# Altium PCB PCB7.PcbDoc (part 2 of 2)
Units mm, origin at the board's own origin, x right, y up, seen from the top; angles counter-clockwise.
Board outline 94.6 x 54.68 mm, 2 copper layers (Top Layer, Bottom Layer); 56 components, 165 nets, 539 pads, 324 vias.
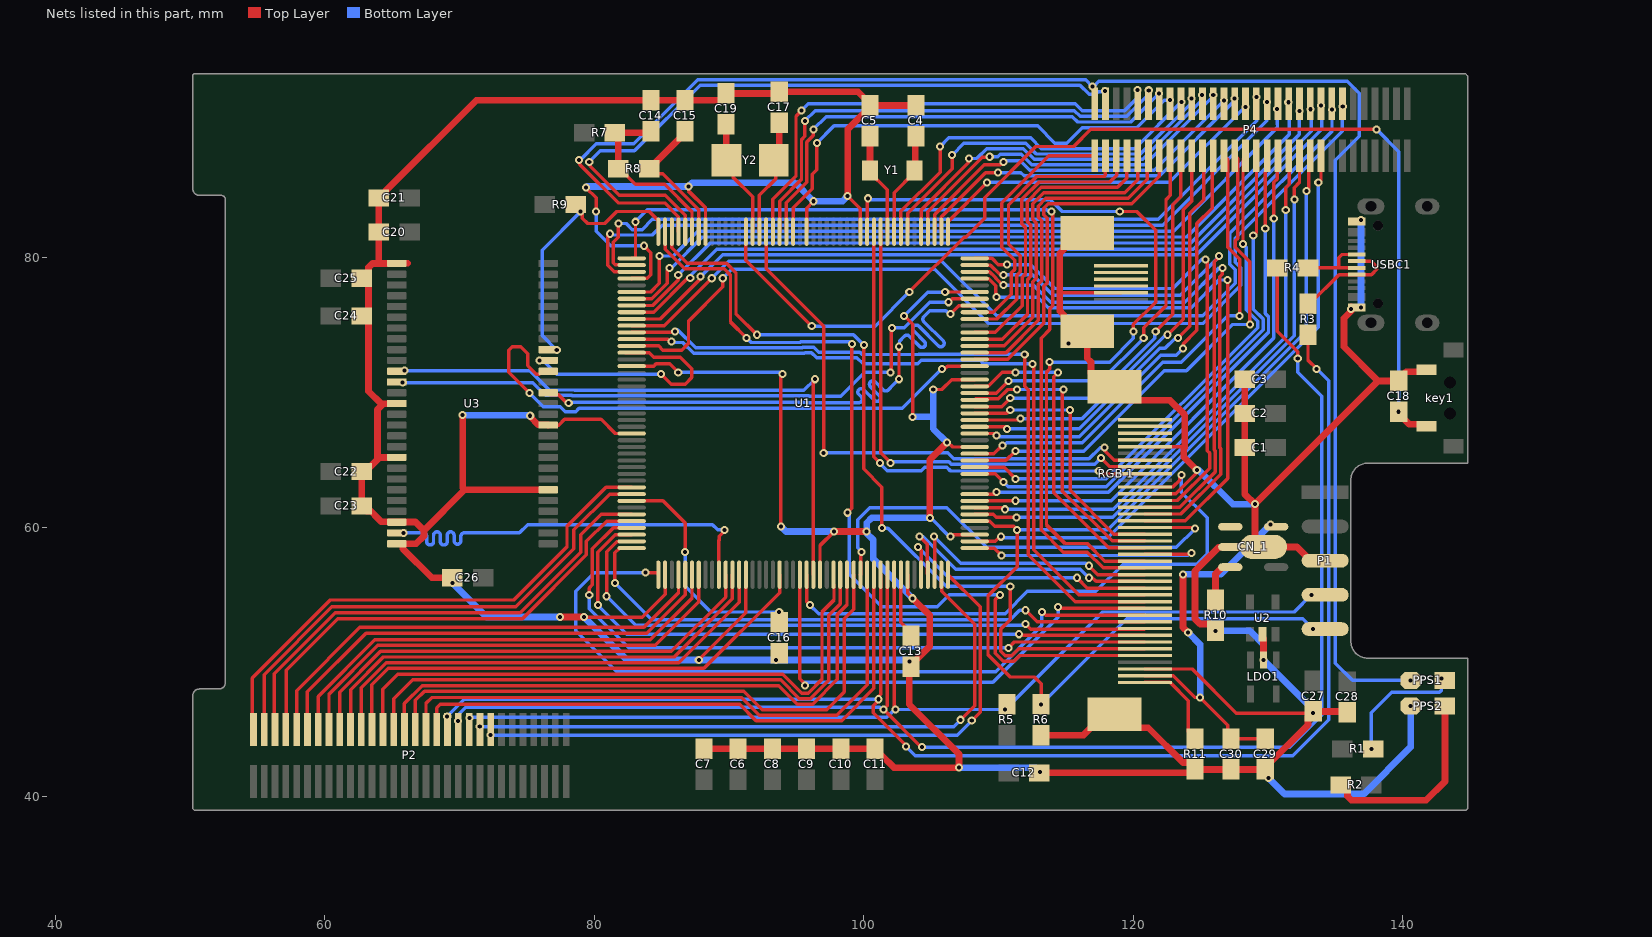
[diagram p2: the nets of this part, all layers, seen from the top]

## Via types
v1: diameter 0.6, hole 0.3, Top Layer to Bottom Layer, 324 vias

## Nets (pads, with @x,y where several pads share a name; then routed paths per layer and width w, separated by ;. In a path a pad name is that pad's centre, name@x,y a point inside that pad or via, vN(x,y) a via of type N, cw(c..) or ccw(c..) an arc to the next point about the centre after c; other vN are vias at no path point) (continued)
FMC_D15: U1.98 U3.53 | length 32
  Top Layer w0.254: U1.98@89.254,56.488 89.254,59.028 89.281,59.055 89.281,59.342 89.662,59.723 v1(89.662,59.817)
  Bottom Layer w0.254: v1(65.843,59.595) 66.675,59.595 67.31,59.595 cw(c67.31,59.341) 67.564,59.341 67.564,58.943 ccw(c67.818,58.943) 68.072,58.943 68.072,59.414 cw(c68.326,59.414) 68.58,59.414 68.58,58.943 ccw(c68.834,58.943) 69.088,58.943 69.088,59.414 cw(c69.342,59.414) 69.596,59.414 69.596,59.004 ccw(c69.85,59.004) 70.104,59.004 70.104,59.341 cw(c70.358,59.341) 70.358,59.595 70.997,59.595 74.454,59.595 75.057,60.198 88.773,60.198 89.154,59.817 v1(89.662,59.817)
FMC_NBL0: U1.169 U3.15 | length 48.3
  Top Layer w0.254: U3.15@76.581,69.989 76.724,69.846 77.347,69.846 77.978,69.215 v1(78.105,69.215) ; v1(102.616,70.993) v1(102.616,73.406) ; v1(106.426,75.819) 107.063,76.456 108.222,76.456 U1.169@108.231,76.465
  Bottom Layer w0.254: v1(78.105,69.215) 78.232,69.215 78.301,69.284 95.826,69.284 95.86,69.25 99.348,69.25 99.633,69.25 ccw(c99.633,69.504) 99.813,69.684 99.633,69.863 cw(c99.813,70.043) 99.633,70.222 cw(c99.813,70.043) 99.992,70.222 100.797,69.418 ccw(c100.977,69.597) 101.156,69.418 ccw(c100.977,69.597) 101.156,69.777 100.497,70.436 cw(c100.676,70.616) 100.497,70.795 cw(c100.676,70.616) 100.856,70.795 101.458,70.194 ccw(c101.637,70.373) 101.817,70.194 102.235,70.612 v1(102.616,70.993) ; v1(102.616,73.406) 102.653,73.443 102.653,73.662 102.653,73.824 103.021,74.192 cw(c103.201,74.012) 103.38,74.192 104.148,73.424 ccw(c104.328,73.603) 104.508,73.424 ccw(c104.328,73.603) 104.508,73.783 103.708,74.583 cw(c103.887,74.763) 103.708,74.942 cw(c103.887,74.763) 104.067,74.942 105.535,73.474 ccw(c105.715,73.653) 105.895,73.474 ccw(c105.715,73.653) 105.895,73.833 104.458,75.27 cw(c104.637,75.449) 104.458,75.629 104.902,76.073 105.156,76.073 106.104,76.073 106.358,75.819 v1(106.426,75.819)
FMC_NBL1: U1.170 U3.39 | length 47.7
  Top Layer w0.254: v1(101.981,71.501) 102.039,71.559 102.039,74.734 v1(102.108,74.803) ; v1(106.299,76.708) 106.556,76.965 U1.170@108.231,76.965
  Bottom Layer w0.254: v1(65.786,70.739) 75.438,70.739 76.385,69.792 78.344,69.792 78.378,69.758 95.923,69.758 95.958,69.723 98.298,69.723 100.076,71.501 v1(101.981,71.501) ; v1(102.108,74.803) 102.997,74.803 104.902,76.708 v1(106.299,76.708)
FMC_SDCLK: U1.112 U3.38 | length 46
  Top Layer w0.254: U1.112@96.254,56.488 96.254,70.854 v1(96.393,70.993)
  Bottom Layer w0.254: v1(65.913,71.628) 75.23,71.628 76.662,70.196 78.511,70.196 78.545,70.162 95.562,70.162 v1(96.393,70.993)
FMC_SDNCAS: U1.160 U3.17 | length 43.3
  Top Layer w0.254: v1(75.184,69.977) 73.66,71.501 73.66,73.152 73.914,73.406 74.549,73.406 75.057,72.898 75.057,72.009 75.692,71.374 75.916,71.374 76.131,71.589 U3.17@76.581,71.589 ; v1(105.791,71.755) 106.006,71.755 106.216,71.965 U1.160@108.231,71.965
  Bottom Layer w0.254: v1(75.184,69.977) 76.2,68.961 77.47,68.961 77.851,68.58 78.613,68.58 78.867,68.834 102.87,68.834 v1(105.791,71.755)
FMC_SDNE0: R9.2 U1.44 U3.19 | length 20.4
  Top Layer w0.254: R9.2@78.613,83.947 79.121,83.439 79.121,82.931 79.502,82.55 80.772,82.55 81.661,83.439 84.089,83.439 84.754,82.774 U1.44@84.754,81.942
  Bottom Layer w0.254: v1(77.216,73.152) 76.131,74.237 76.131,80.576 v1(78.994,83.439)
FMC_SDNRAS: U1.59 U3.18 | length 18.3
  Top Layer w0.254: U1.59@82.296,72.956 83.689,72.956 83.698,72.965 84.069,72.965 84.412,72.622 86.382,72.622 87.249,71.755 87.249,71.12 86.741,70.612 85.725,70.612 v1(84.963,71.374)
  Bottom Layer w0.254: v1(75.946,72.39) 76.012,72.324 76.266,72.324 77.216,71.374 v1(84.963,71.374)
GND: "RGB 1.3" "RGB 1.29" "RGB 1.36" "RGB 1.45" "RGB 1.G1" "RGB 1.G2" "RGB 1.G3" "RGB 1.G4" C1.2 C2.1 C3.1 C4.1 C5.1 C6.2 C7.2 C8.2 C9.2 C10.2 C11.2 C12.2 C13.2 C14.1 C15.2 C16.2 C17.2 C18.1 C19.2 C20.1 C21.1 C22.1 C23.1 C24.1 C25.1 C26.1 C27.1 C28.1 C29.2 C30.2 CN_1.2 key1.1 LDO1.2 P1.3 PPS2.2 R6.1 R10.1 R11.2 U1.14 U1.22 U1.37 U1.48 U1.61 U1.71 U1.90 U1.102 U1.113 U1.126 U1.135 U1.148 U1.158 U1.171 U2.2 U3.6 U3.12 U3.28 U3.41 U3.46 U3.52 U3.54 USBC1.A1 USBC1.A12 USBC1.B1 USBC1.B12 | length 521.1
  Top Layer w0.254: U3.12@76.581,67.589 77.368,67.589 77.793,68.014 80.503,68.014 81.552,66.965 U1.71@82.777,66.965 ; v1(79.248,53.34) 83.566,53.34 85.254,55.028 U1.90@85.254,56.488 ; v1(79.375,85.217) 80.137,84.455 v1(80.137,83.439) ; U1.61@82.777,71.965 84.411,71.965 84.582,72.136 85.598,72.136 v1(86.233,71.501) ; U1.48@82.777,78.465 82.786,78.474 83.935,78.474 84.201,78.74 84.201,80.391 v1(83.693,80.899) ; v1@86.995,85.217 86.995,84.963 88.254,83.704 U1.37@88.254,81.942 ; v1(87.757,50.165) 91.254,53.662 U1.102@91.254,56.488 ; v1(93.853,60.071) 93.853,71.153 93.98,71.28 v1(93.98,71.374) ; U1.22@95.754,81.942 95.754,83.689 v1(96.266,84.201) ; U1.113@96.754,56.488 96.754,58.654 v1(97.79,59.69) ; v1(98.806,84.582) 99.754,83.634 U1.14@99.754,81.942 ; v1(102.997,75.692) 103.632,75.057 v1(103.632,68.199) ; U1.126@103.254,56.488 103.254,55.115 v1(103.632,54.737) ; v1(105.156,70.231) 105.794,70.231 106.528,70.965 U1.158@108.231,70.965 ; v1(106.045,77.47) 106.05,77.465 U1.171@108.231,77.465 ; v1(106.172,66.294) 106.266,66.294 106.595,65.965 U1.148@108.231,65.965 ; v1(106.426,59.309) 106.582,59.465 U1.135@108.231,59.465 ; 114.554,77.47 114.613,77.411 119.087,77.411 ; 120.857,49.491 124.372,49.491 127.658,46.205 C27.1@133.108,46.205 ; 120.857,62.491 123.161,62.491 124.714,64.044 v1(124.714,64.262) ; 120.857,65.991 123.747,65.991 123.825,65.913
  Top Layer w0.5: 64.161,69.189 63.246,70.104 63.246,75.692 63.246,78.486 63.246,79.296 63.539,79.589 64.008,79.589 ; U3.54@65.341,58.789 U3.54@65.791,58.789 ; U3.46@65.341,65.189 63.919,65.189 ; U3.41@65.341,69.189 65.321,69.169 64.343,69.169 63.919,68.745 63.919,65.189 ; 66.147,79.609 65.361,79.609 U3.28@65.341,79.589 64.008,79.589 ; C26.1@69.469,56.261 67.957,56.261 65.811,58.407 65.811,58.769 U3.54@65.791,58.789 ; v1(70.231,68.326) 70.231,62.934 70.376,62.789 ; v1(75.248,68.284) 75.248,68.206 75.845,67.609 76.561,67.609 U3.12@76.581,67.589 ; U3.6@76.581,62.789 70.376,62.789 ; v1(77.47,53.34) v1(79.248,53.34) ; C7.2@88.138,43.561 C6.2@90.678,43.561 C8.2@93.218,43.561 C9.2@95.758,43.561 C10.2@98.298,43.561 C11.2@100.838,43.561 100.838,43.434 101.223,43.049 101.35,43.049 102.235,42.164 v1(107.061,42.164) 107.061,43.18 103.378,46.863 103.378,49.53 C13.2@103.505,49.657 103.505,49.784 104.902,51.181 104.902,53.467 v1(103.632,54.737) ; v1(97.79,59.69) v1(100.203,59.69) ; v1(98.806,84.582) 98.806,89.535 100.457,91.186 C5.1@100.457,91.313 ; C4.1@103.886,91.313 C5.1@100.457,91.313 ; v1(104.902,60.706) 104.902,65.024 v1(106.172,66.294) ; C12.2@113.03,41.783 124.333,41.783 R11.2@124.587,42.037 ; R6.1@113.157,44.577 116.308,44.577 117.86,46.129 118.61,46.129 119.61,45.129 121.114,45.129 123.694,42.549 124.202,42.549 124.587,42.164 R11.2@124.587,42.037 ; 116.586,81.849 115.836,81.849 114.836,80.849 114.836,80.623 114.554,80.341 114.554,77.47 114.554,76.057 114.836,75.775 114.836,75.549 115.836,74.549 116.586,74.549 116.586,72.549 116.86,72.275 116.86,71.429 117.86,70.429 118.61,70.429 119.61,69.429 122.722,69.429 123.825,68.326 123.825,65.913 ; 123.747,65.991 123.747,65.229 v1(124.714,64.262) ; v1(126.111,52.324) 126.111,52.451 125.726,52.836 124.964,52.836 124.587,53.213 124.587,56.769 126.35,58.532 127.49,58.532 CN_1.2@127.505,58.547 ; C3.1@128.27,70.993 C2.1@128.27,68.453 C1.2@128.27,65.913 128.27,62.484 v1(129.032,61.722) ; U2.2@129.606,52.07 129.606,51.82 129.667,51.759 v1(129.667,50.165) ; P1.3@134.239,57.531 133.14,57.531 132.9,57.771 132.9,57.802 132.155,58.547 CN_1.2@129.655,58.547 129.633,58.547 129.032,59.148 v1(129.032,61.722) ; C28.1@135.881,46.268 135.809,46.34 C27.1@133.358,46.34 132.973,45.955 132.973,45.343 129.794,42.164 C29.2@129.794,42.037 C30.2@127.254,42.037 R11.2@124.587,42.037 ; USBC1.A1@136.169,76.052 136.069,75.952 135.636,75.519 135.636,73.406 138.176,70.866 ; USBC1.A1@136.169,76.152 v1(136.169,76.202) USBC1.B12@136.169,76.352 ; key1.1@141.76,71.696 141.61,71.546 140.253,71.546 139.7,70.993 C18.1@139.7,70.866 138.176,70.866 ; 63.919,65.189 63.919,65.043 63.396,64.52 63.123,64.52 C22.1@62.738,64.135 C23.1@62.738,61.595 63.123,61.21 63.411,61.21 63.919,60.702 64.212,60.409 65.321,60.409 U3.52@65.341,60.389 66.738,60.389 67.357,59.77 ; 64.008,79.589 C20.1@64.008,81.915 C21.1@64.008,84.455 64.135,84.455 64.52,84.84 64.52,84.967 71.247,91.694 C14.1@84.201,91.694 C15.2@86.741,91.694 89.404,91.694 89.789,92.079 C19.2@89.789,92.202 93.599,92.202 C17.2@93.726,92.329 99.568,92.329 100.457,91.44 C5.1@100.457,91.313 ; U3.54@65.791,58.789 66.79,58.789 67.357,59.356 67.357,59.77 ; 67.357,59.77 70.376,62.789 ; v1(129.032,61.722) 138.176,70.866
  Bottom Layer w0.254: v1(80.137,83.439) 80.137,81.988 81.226,80.899 v1(83.693,80.899) ; v1(86.233,71.501) 93.759,71.501 93.886,71.374 v1(93.98,71.374) ; v1@102.902,75.597 v1(102.997,75.692) 104.738,77.433 106.008,77.433 v1(106.045,77.47) ; v1(104.902,60.706) 104.966,60.706 106.363,59.309 v1(106.426,59.309)
  Bottom Layer w0.5: v1(69.469,55.88) 72.009,53.34 v1(77.47,53.34) ; v1(70.231,68.326) 75.206,68.326 v1(75.248,68.284) ; v1(79.248,53.34) 82.423,50.165 v1(87.757,50.165) v1(93.472,50.165) 103.251,50.165 v1(103.378,50.038) ; v1(79.375,85.217) 79.402,85.217 79.478,85.293 v1(86.996,85.293) 87.282,85.579 94.888,85.579 v1(96.266,84.201) 98.425,84.201 v1(98.806,84.582) ; v1(93.853,60.071) 94.234,59.69 v1(97.79,59.69) ; v1(103.632,54.737) 100.711,57.658 100.711,59.055 100.203,59.563 v1(100.203,59.69) 100.222,59.709 100.222,60.344 100.584,60.706 v1(104.902,60.706) ; v1(103.632,68.199) 105.156,68.199 ; v1(105.156,70.231) 105.156,68.199 ; v1(106.172,66.294) 105.156,67.31 105.156,68.199 ; v1(107.061,42.164) 112.749,42.164 113.066,41.846 v1(113.093,41.846) ; v1(124.714,64.262) 124.841,64.262 127.381,61.722 v1(129.032,61.722) ; v1(126.111,52.324) 128.651,52.324 129.667,51.308 v1(129.667,50.165) 133.35,46.482 v1(133.35,46.228) ; v1(130.048,41.402) 131.238,40.212 137.113,40.212 140.589,43.688 v1(140.589,46.736) ; v1(136.906,76.327) v1(136.906,82.804)
  other v1: 115.189,73.66
LCD_B0: "RGB 1.21" U1.157 | length 24.1
  Top Layer w0.254: U1.157@108.231,70.465 109.235,70.465 110.271,71.501 v1(111.252,71.501) ; v1(114.427,71.501) 114.104,71.178 114.104,62.553 118.166,58.491 120.857,58.491
  Bottom Layer w0.254: v1(111.252,71.501) v1(114.427,71.501)
LCD_B1: "RGB 1.22" U1.155 | length 22.1
  Top Layer w0.254: U1.155@108.231,69.465 108.304,69.538 109.987,69.538 110.68,70.231 v1(111.379,70.231) ; v1(114.808,70.231) 114.739,70.162 114.739,62.68 118.428,58.991 120.857,58.991
  Bottom Layer w0.254: v1(111.379,70.231) v1(114.808,70.231)
LCD_B2: "RGB 1.23" U1.153 | length 20
  Top Layer w0.254: U1.153@108.231,68.465 110.629,68.465 v1(110.871,68.707) ; v1(115.316,68.707) 115.316,62.738 118.563,59.491 120.857,59.491
  Bottom Layer w0.254: v1(110.871,68.707) v1(115.316,68.707)
LCD_B3: "RGB 1.24" U1.119 | length 35.2
  Top Layer w0.254: U1.119@99.754,56.488 99.763,56.497 99.763,58.107 v1(99.822,58.166) ; 120.857,59.991 124.413,59.991 v1@124.587,59.817
  Bottom Layer w0.254: v1(99.822,58.166) 99.822,58.234 99.568,58.488 99.568,60.579 100.457,61.468 106.172,61.468 109.13,58.51 123.186,58.51 v1(124.587,59.911)
LCD_B4: "RGB 1.25" U1.173 | length 43.1
  Top Layer w0.254: U1.173@108.231,78.465 109.261,78.465 109.382,78.344 109.382,78.334 109.786,77.93 109.786,77.158 v1(109.855,77.089) ; 120.857,60.491 123.864,60.491 127,63.627 v1(127,78.359)
  Bottom Layer w0.254: v1(109.855,77.089) 112.913,77.089 113.698,76.304 124.31,76.304 126.365,78.359 v1(127,78.359)
LCD_B5: "RGB 1.26" U1.174 | length 42.6
  Top Layer w0.254: U1.174@108.231,78.965 109.332,78.965 109.786,78.511 109.786,78.501 110.309,77.978 v1(110.363,77.978) ; 120.857,60.991 123.529,60.991 126.48,63.942 126.48,65.852 126.423,65.909 126.423,78.598 126.619,78.794 v1(126.619,79.248)
  Bottom Layer w0.254: v1(110.363,77.978) 112.595,77.978 113.865,76.708 123.825,76.708 126.365,79.248 v1(126.619,79.248)
LCD_B6: "RGB 1.27" U1.175 | length 42.8
  Top Layer w0.254: U1.175@108.231,79.465 109.403,79.465 110.128,78.74 v1(110.363,78.74) ; 120.857,61.491 123.457,61.491 126.076,64.11 126.076,65.684 126.019,65.741 126.019,79.718 126.365,80.064 v1(126.365,80.137)
  Bottom Layer w0.254: v1(110.363,78.74) 112.522,78.74 114.046,77.216 123.498,77.216 126.365,80.083 v1(126.365,80.137)
LCD_B7: "RGB 1.28" U1.176 | length 40.4
  Top Layer w0.254: U1.176@108.231,79.965 109.519,79.965 109.982,79.502 v1(110.617,79.502) ; 120.857,61.991 123.268,61.991 125.672,64.395 125.672,65.517 125.499,65.69 125.499,79.733 v1(125.349,79.883)
  Bottom Layer w0.254: v1(110.617,79.502) 112.395,79.502 114.173,77.724 122.936,77.724 125.095,79.883 v1(125.349,79.883)
LCD_CLK: "RGB 1.30" U1.111 | length 43.8
  Top Layer w0.254: U1.111@95.754,56.488 95.754,54.487 v1(96.012,54.229) ; 120.857,62.991 120.859,62.993 122.937,62.993 123.444,63.5 123.444,63.754 v1(123.571,63.881)
  Bottom Layer w0.254: v1(96.012,54.229) 96.647,53.594 110.49,53.594 112.141,55.245 117.221,55.245 119.253,57.277 124.714,57.277 125.476,58.039 125.476,60.706 123.571,62.611 v1(123.571,63.881)
LCD_CS: "RGB 1.38"
LCD_DE: "RGB 1.34" U1.28 | length 43
  Top Layer w0.254: U1.28@92.754,81.942 92.754,79.204 97.028,74.93 97.028,71.301 97.031,71.298 97.031,70.927 97.031,70.8 97.031,65.535 v1(97.028,65.532) ; v1(117.856,65.913) 117.856,65.713 118.578,64.991 120.857,64.991
  Bottom Layer w0.254: v1(97.028,65.532) 106.226,65.532 106.676,65.082 116.717,65.082 117.548,65.913 v1(117.856,65.913)
LCD_G0: "RGB 1.13" U1.56 | length 55.1
  Top Layer w0.254: U1.56@82.777,74.465 85.895,74.465 v1(85.979,74.549) ; v1(111.945,72.84) 111.945,70.481 112.21,70.216 112.21,57.97 115.689,54.491 120.857,54.491
  Bottom Layer w0.254: v1@85.979,74.676 86.179,74.676 87.541,73.314 95.422,73.314 95.479,73.371 96.291,73.371 96.665,72.998 99.722,72.998 99.891,72.829 104.071,72.829 104.082,72.84 v1(111.945,72.84)
LCD_G1: "RGB 1.14" U1.57 | length 54.3
  Top Layer w0.254: U1.57@82.777,73.965 85.453,73.965 85.631,73.787 v1(85.725,73.787) ; v1(112.522,72.136) 112.614,72.044 112.614,58.328 115.951,54.991 120.857,54.991
  Bottom Layer w0.254: v1(85.725,73.787) 85.791,73.721 86.563,73.721 87.374,72.91 95.589,72.91 95.646,72.967 96.124,72.967 96.497,72.594 99.491,72.594 99.949,72.136 104.013,72.136 104.267,72.39 108.649,72.39 108.839,72.2 108.839,72.136 v1(112.522,72.136)
LCD_G2: "RGB 1.15" U1.128 | length 20.3
  Top Layer w0.254: v1(104.013,58.547) 104.254,58.306 U1.128@104.254,56.488 ; v1(115.824,56.261) 116.594,55.491 120.857,55.491
  Bottom Layer w0.254: v1(104.013,58.547) 106.299,56.261 v1(115.824,56.261)
LCD_G3: "RGB 1.16" U1.129 | length 21.2
  Top Layer w0.254: v1(104.14,59.309) 104.706,58.743 104.706,56.536 U1.129@104.754,56.488 ; v1(116.713,56.261) 116.967,56.261 117.237,55.991 120.857,55.991
  Bottom Layer w0.254: v1(104.14,59.309) 104.409,59.309 106.822,56.896 116.078,56.896 v1(116.713,56.261)
LCD_G4: "RGB 1.17" U1.130 | length 19.6
  Top Layer w0.254: v1(105.226,59.308) 105.254,59.28 U1.130@105.254,56.488 ; v1(116.713,57.15) 117.372,56.491 120.857,56.491
  Bottom Layer w0.254: v1(105.226,59.308) 107.199,57.335 116.46,57.335 116.645,57.15 v1(116.713,57.15)
LCD_G5: "RGB 1.18" U1.45 | length 67.2
  Top Layer w0.254: U1.45@82.777,79.965 83.037,79.965 83.058,79.986 v1(83.058,82.677) ; v1(113.919,83.439) 114.022,83.336 114.022,76.43 113.797,76.205 113.797,74.681 113.158,74.042 113.158,59.816 114.808,58.166 116.586,58.166 117.761,56.991 120.857,56.991
  Bottom Layer w0.254: v1(83.058,82.677) 83.947,83.566 113.597,83.566 113.658,83.505 113.853,83.505 v1(113.919,83.439)
LCD_G6: "RGB 1.19" U1.13 | length 61
  Top Layer w0.254: U1.13@100.254,81.942 100.254,84.252 100.33,84.328 v1(100.33,84.422) ; v1(113.792,72.263) 113.792,71.755 113.562,71.525 113.562,60.174 114.935,58.801 116.586,58.801 117.896,57.491 120.857,57.491 ; v1(118.999,83.439) 120.269,83.439 121.666,82.042 121.666,76.708 120.015,75.057 v1(120.015,74.549)
  Bottom Layer w0.254: v1@100.33,84.328 113.846,84.328 114.735,83.439 v1(118.999,83.439) ; v1(113.792,72.263) 118.246,72.263 120.015,74.032 v1(120.015,74.549)
LCD_G7: "RGB 1.20" U1.133 | length 20.1
  Top Layer w0.254: U1.133@108.231,58.465 109.683,58.465 v1(110.236,57.912) ; 120.857,57.991 124.285,57.991 v1@124.333,58.039
  Bottom Layer w0.254: v1@110.065,57.912 124.019,57.912 124.215,58.109 v1(124.309,58.109)
LCD_HSVNC: "RGB 1.32" U1.12 | length 37.6
  Top Layer w0.254: U1.12@100.754,81.942 100.754,65.235 v1(101.219,64.77) ; v1(117.441,64.169) 117.619,63.991 120.857,63.991
  Bottom Layer w0.254: v1(101.219,64.77) 101.219,64.716 101.742,64.193 104.262,64.193 104.527,64.458 106.157,64.458 106.435,64.18 117.43,64.18 v1(117.441,64.169)
LCD_R0: "RGB 1.5" U1.43 | length 66
  Top Layer w0.254: U1.43@85.254,81.942 85.254,80.65 86.46,79.444 86.714,79.19 89.647,79.19 90.112,78.725 90.112,75.242 v1(91.313,74.041) ; v1(98.806,61.087) 98.806,61.091 99.123,61.409 v1(99.123,73.596) ; v1(110.109,54.991) 109.763,54.645 109.763,50.648 110.338,50.073 111.15,50.073 111.568,50.491 120.857,50.491
  Bottom Layer w0.254: v1(91.313,74.041) 91.636,73.718 95.254,73.718 95.311,73.775 98.945,73.775 v1(99.123,73.596) ; v1(98.806,61.087) 98.933,60.96 98.933,56.515 101.346,54.102 105.464,54.102 106.353,54.991 v1(110.109,54.991)
LCD_R1: "RGB 1.6" U1.42 | length 61.8
  Top Layer w0.254: U1.42@85.754,81.942 85.754,80.743 86.903,79.594 89.814,79.594 90.516,78.892 90.516,75.854 v1(92.075,74.295) ; v1(100.003,73.533) 100.003,64.335 101.346,62.992 v1(101.346,59.944) ; v1(110.871,55.626) 110.871,53.159 110.167,52.455 110.167,50.815 110.505,50.477 110.983,50.477 111.497,50.991 120.857,50.991
  Bottom Layer w0.254: v1(92.075,74.295) 99.241,74.295 v1(100.003,73.533) ; v1(101.346,59.944) 101.8,59.944 106.118,55.626 v1(110.871,55.626)
LCD_R2: "RGB 1.7" U1.85 | length 50.7
  Top Layer w0.254: v1(79.629,54.991) 79.629,55.499 79.86,55.73 79.86,58.397 81.428,59.965 U1.85@82.777,59.965 ; v1(110.744,51.054) 111.181,51.491 120.857,51.491
  Bottom Layer w0.254: v1(79.629,54.991) 79.629,53.975 82.55,51.054 v1(110.744,51.054)
LCD_R3: "RGB 1.8" U1.86 | length 48.5
  Top Layer w0.254: v1(80.264,54.229) 80.264,58.166 81.554,59.456 82.768,59.456 U1.86@82.777,59.465 ; v1(111.506,52.07) 111.585,51.991 120.857,51.991
  Bottom Layer w0.254: v1(80.264,54.229) 82.423,52.07 v1(111.506,52.07)
LCD_R4: "RGB 1.9" U1.87 | length 45.5
  Top Layer w0.254: v1(80.922,54.887) 80.922,58.189 81.661,58.928 U1.87@81.788,58.928 ; v1(112.014,52.832) 112.408,52.438 120.803,52.438 120.857,52.491
  Bottom Layer w0.254: v1(80.922,54.887) 83.069,52.74 111.922,52.74 v1(112.014,52.832)
LCD_R5: "RGB 1.10" U1.88 | length 44.7
  Top Layer w0.254: v1(81.534,55.88) 81.534,58.11 81.889,58.465 U1.88@82.777,58.465 ; v1(112.014,53.848) 112.871,52.991 120.857,52.991
  Bottom Layer w0.254: v1(81.534,55.88) 84.27,53.144 110.856,53.144 111.56,53.848 v1(112.014,53.848)
LCD_R6: "RGB 1.11" U1.89 | length 55.8
  Top Layer w0.254: v1(83.812,56.642) 84.733,56.642 84.754,56.621 U1.89@84.754,56.488 ; v1(113.221,53.721) 113.284,53.721 113.514,53.491 120.857,53.491
  Bottom Layer w0.254: v1(83.812,56.642) 80.01,56.642 78.613,55.245 78.613,52.324 81.661,49.276 109.782,49.276 113.221,52.715 v1(113.221,53.721)
LCD_R7: "RGB 1.12" U1.110 | length 36.6
  Top Layer w0.254: U1.110@95.254,56.488 95.254,48.764 95.631,48.387 v1(95.631,48.26) ; v1(114.427,54.102) 114.538,53.991 120.857,53.991
  Bottom Layer w0.254: v1@95.489,48.514 109.591,48.514 114.427,53.35 v1(114.427,54.102)
LCD_RESTE: "RGB 1.37"
LCD_SCL: "RGB 1.39"
LCD_SDI: "RGB 1.40"
LCD_VSYNC: "RGB 1.33" U1.11 | length 36.9
  Top Layer w0.254: U1.11@101.254,81.942 101.254,65.551 101.981,64.824 v1(101.981,64.77) ; v1(117.602,65.151) 118.262,64.491 120.857,64.491
  Bottom Layer w0.254: v1(101.981,64.77) 102.073,64.862 106.324,64.862 106.508,64.678 117.129,64.678 v1(117.602,65.151)
LEDA: "RGB 1.2" C29.1 C30.1 CN_1.5 | length 29
  Top Layer w0.254: 120.857,48.991 122.967,48.991 124.587,47.371 v1(124.968,47.371) 127.022,45.317 127.022,44.555 C30.1@127.254,44.323 C29.1@129.794,44.323
  Top Layer w0.5: v1(123.698,56.515) 123.698,53.183 123.698,52.578 v1(124.079,52.197)
  Bottom Layer w0.5: v1(123.698,56.515) 126.492,56.515 v1(130.175,60.198) ; v1(124.079,52.197) 124.968,51.308 v1(124.968,47.371)
LEDK: "RGB 1.1" R11.1 | length 6.8
  Top Layer w0.254: 120.857,48.491 122.728,48.491 124.079,47.14 124.079,44.831 R11.1@124.587,44.323
NetC13_1: C13.1 U1.125 | length 4.5
  Top Layer w0.254: U1.125@102.754,56.488 102.754,52.948 103.378,52.324 C13.1@103.505,52.324
NetC16_1: C16.1 U1.81 | length 17.1
  Top Layer w0.254: U1.81@82.777,61.965 85.101,61.965 86.741,60.325 v1(86.741,58.166)
  Bottom Layer w0.254: v1(86.741,58.166) 86.741,55.626 88.646,53.721 v1(93.726,53.721)
NetCN_1_3: CN_1.3 R10.2 | length 3.2
  Top Layer w0.5: R10.2@126.111,54.61 126.111,56.541 126.617,57.047 CN_1.3@127.205,57.047
NetPPS1_1: PPS1.1 R1.1 | length 9.4
  Bottom Layer w0.254: v1(137.668,43.561) 137.668,46.228 139.192,47.752 142.726,47.752 142.875,47.901 v1(142.875,48.768)
NetPPS2_1: PPS2.1 R2.1 | length 14.7
  Top Layer w0.5: R2.1@135.382,40.894 135.509,40.894 135.894,40.509 135.894,40.044 136.187,39.751 141.732,39.751 143.129,41.148 PPS2.1@143.129,46.736
NetR3_1: R3.1 USBC1.A7 USBC1.B7 | length 8
  Top Layer w0.254: R3.1@132.969,76.581 133.096,76.581 135.267,78.752 USBC1.B7@136.569,78.752 137.68,78.752 138.071,79.143 138.071,79.353 137.668,79.756 136.573,79.756 USBC1.A7@136.569,79.752
NetR4_1: R4.1 USBC1.A6 USBC1.B6 | length 5.8
  Top Layer w0.254: R4.1@132.969,79.248 132.973,79.252 135.255,79.252 ; USBC1.A6@136.569,79.252 135.255,79.252 ; USBC1.B6@136.569,80.252 135.497,80.252 135.255,80.01 135.255,79.252
OSC_IN: C17.1 U1.29 Y2.2 | length 8.9
  Top Layer w0.254: U1.29@92.254,81.942 92.254,84.634 93.472,85.852 Y2.2@93.472,87.404
  Top Layer w0.5: Y2.2@93.317,87.249 93.472,87.404 93.726,87.658 C17.1@93.726,90.043
OSC_OUT: C19.1 U1.30 Y2.1 | length 8.8
  Top Layer w0.254: Y2.1@90.297,87.122 90.297,85.979 91.754,84.522 U1.30@91.754,81.942
  Top Layer w0.5: C19.1@89.789,89.916 89.789,87.63 Y2.1@90.297,87.122
PA0: P4.57 U1.40 | length 51.2
  Top Layer w0.254: v1(79.629,87.122) 79.695,87.056 79.695,86.802 81.852,84.645 85.281,84.645 86.754,83.172 U1.40@86.754,81.942
  Bottom Layer w0.254: v1(79.629,87.122) 80.448,87.941 82.988,87.941 87.86,92.813 116.048,92.813 116.728,92.133 117.206,92.133 117.39,92.317 v1@117.962,92.317
  other v1: 117.903,92.383
PA1: P4.59 PPS1.2 U1.41 | length 120.6
  Top Layer w0.254: v1(78.867,87.249) 78.933,87.183 78.933,86.929 81.788,84.074 85.217,84.074 86.245,83.046 86.245,81.951 U1.41@86.254,81.942
  Bottom Layer w0.254: v1(78.867,87.249) 78.94,87.249 80.152,88.461 82.937,88.461 87.693,93.217 116.46,93.217 v1(116.967,92.71) 117.061,92.71 117.442,93.091 135.89,93.091 136.779,92.202 136.779,89.027 135.001,87.249 135.001,49.911 136.271,48.641 v1(140.589,48.641)
PA3: P4.27 U1.47 | length 58.1
  Top Layer w0.254: v1(81.153,81.788) 81.003,81.638 81.003,79.447 81.485,78.965 U1.47@82.777,78.965
  Bottom Layer w0.254: v1(81.153,81.788) 81.245,81.696 84.297,81.696 85.031,82.43 122.181,82.43 128.651,88.9 129.921,90.17 v1(129.921,91.567)
PA4: P4.25 U1.50 | length 55.6
  Top Layer w0.254: U1.50@82.777,77.465 84.196,77.465 84.836,78.105 v1(84.836,80.137)
  Bottom Layer w0.254: v1(84.836,80.137) 85.852,80.137 87.683,81.968 122.989,81.968 130.705,89.684 130.705,89.894 130.683,89.916 v1(130.683,91.059)
PA5: P4.23 U1.51 | length 56.8
  Top Layer w0.254: U1.51@82.777,76.965 84.267,76.965 85.402,78.1 85.402,79.052 v1(85.598,79.248)
  Bottom Layer w0.254: v1(85.598,79.248) 85.598,79.253 85.537,79.314 85.791,79.314 88.026,81.549 123.967,81.549 131.572,89.154 v1@131.572,91.44
  other v1: 131.505,91.549
PA6: P4.21 U1.52 | length 56.7
  Top Layer w0.254: U1.52@82.777,76.465 84.339,76.465 86.233,78.359 v1(86.233,78.74)
  Bottom Layer w0.254: v1(86.233,78.74) 88.595,81.102 124.282,81.102 132.334,89.154 v1@132.334,90.805
  other v1: 132.346,90.885
PA7: P4.19 U1.53 | length 57.6
  Top Layer w0.254: U1.53@82.777,75.965 84.41,75.965 86.958,78.513 v1(87.122,78.513)
  Bottom Layer w0.254: v1(87.122,78.513) 87.122,78.667 89.1,80.645 124.46,80.645 133.223,89.408 v1@133.223,90.932
  other v1: 133.148,91.028
PA9: P2.34 U1.120 | length 44.5
  Top Layer w0.254: P2.34@67.514,45.008 67.514,46.94 67.945,47.371 90.932,47.371 92.236,46.067 98.01,46.067 100.254,48.311 U1.120@100.254,56.488
PA10: P2.36 U1.121 | length 44.1
  Top Layer w0.254: P2.36@68.314,45.008 68.314,46.597 68.58,46.863 90.805,46.863 92.005,45.663 98.368,45.663 100.754,48.049 U1.121@100.754,56.488
PA11/USB_DM: P2.38 R3.2 U1.122 | length 108.5
  Top Layer w0.254: U1.122@101.254,56.488 101.254,47.601 101.158,47.505 101.158,47.31 v1(101.092,47.244) 101.092,47.15 100.711,46.769 100.711,46.228 103.124,43.815 v1(103.124,43.752) ; R3.2@132.969,74.295 132.969,72.39 v1(133.604,71.755)
  Bottom Layer w0.254: v1(69.088,45.974) 70.358,47.244 v1(101.092,47.244) ; v1(103.124,43.752) 103.822,43.053 131.826,43.053 134.493,45.72 134.493,70.866 v1(133.604,71.755)
PA12/USB_DP: P2.40 R4.2 U1.123 | length 111.7
  Top Layer w0.254: U1.123@101.754,56.488 101.754,46.763 v1(101.473,46.482) 104.267,43.688 v1(104.315,43.688) ; R4.2@130.683,79.248 130.683,74.549 132.207,73.025 v1(132.207,72.517)
  Bottom Layer w0.254: v1(69.886,45.641) 69.891,45.646 69.891,46.091 70.454,46.654 101.207,46.654 101.379,46.482 v1(101.473,46.482) ; v1(104.315,43.688) 131.626,43.688 133.985,46.047 133.985,69.723 132.207,71.501 v1(132.207,72.517)
"PA13 SWDIO": P1.4 P2.42 R5.2 U1.124 | length 76.3
  Top Layer w0.254: U1.124@102.254,56.488 102.254,46.59 v1(102.362,46.482)
  Bottom Layer w0.254: v1(70.739,45.847) 70.797,45.905 101.712,45.905 102.289,46.482 v1(102.362,46.482) v1(110.49,46.482) 117.729,53.721 131.953,53.721 v1(133.223,54.991)
"PA14 SWCLK": P1.5 P4.20 R6.2 U1.137 | length 83.8
  Top Layer w0.254: U1.137@108.231,60.465 108.24,60.456 109.343,60.456 109.728,60.071 111.125,60.071 v1(111.379,59.817) 111.379,57.077 109.22,54.918 109.22,50.546 110.871,48.895 112.649,48.895 113.157,48.387 v1(113.157,46.863) ; v1(132.842,84.963) 133.035,85.156 133.035,87.48 P4.20@133.135,87.58
  Bottom Layer w0.254: v1(111.379,59.817) 118.12,59.817 132.842,74.539 v1(132.842,84.963) ; v1(113.157,46.863) 119.507,53.213 132.588,53.213 v1(133.35,52.451)
PA15: P4.22 U1.138 | length 42.9
  Top Layer w0.254: U1.138@108.231,60.965 109.596,60.965 109.826,60.735 v1(111.35,60.735) ; v1(131.953,84.328) 131.953,85.217 132.335,85.599 P4.22@132.335,87.58
  Bottom Layer w0.254: v1(111.35,60.735) 118.466,60.735 131.953,74.222 v1(131.953,84.328)
PB2: P4.13 U1.58 | length 68.6
  Top Layer w0.254: U1.58@82.777,73.465 84.777,73.465 85.09,73.152 86.487,73.152 86.995,73.66 86.995,75.311 89.535,77.851 v1(89.535,78.486)
  Bottom Layer w0.254: v1(89.535,78.486) 90.193,79.144 105.26,79.144 109.278,75.126 125.154,75.126 127.981,77.953 127.981,79.273 127.566,79.688 127.566,81.465 135.509,89.408 v1@135.509,91.059
  other v1: 135.547,91.219
PB3: P4.48 U1.161 | length 26.1
  Top Layer w0.254: U1.161@108.231,72.465 110.692,72.465 113.364,75.137 113.364,77.878 113.618,78.132 113.618,82.924 113.342,83.2 113.342,83.678 113.68,84.016 119.903,84.016 121.935,86.048 P4.48@121.935,87.58
PB4: P4.50 U1.162 | length 25.1
  Top Layer w0.254: U1.162@108.231,72.965 110.557,72.965 112.96,75.368 112.96,78.045 113.214,78.299 113.214,82.757 112.938,83.033 112.938,83.845 113.513,84.42 119.625,84.42 121.031,85.826 121.031,87.476 P4.50@121.135,87.58
PB5: P4.52 U1.163 | length 24.2
  Top Layer w0.254: U1.163@108.231,73.465 110.422,73.465 112.556,75.599 112.556,78.213 112.81,78.467 112.81,82.589 112.534,82.865 112.534,84.013 113.345,84.824 119.368,84.824 120.335,85.791 P4.52@120.335,87.58
PB6: P4.54 U1.164 | length 23
  Top Layer w0.254: U1.164@108.231,73.965 110.287,73.965 112.152,75.83 112.152,78.38 112.406,78.634 112.406,82.422 112.13,82.698 112.13,84.18 113.178,85.228 118.833,85.228 119.507,85.902 119.507,87.552 P4.54@119.535,87.58
PB7: P4.56 U1.165 | length 21.7
  Top Layer w0.254: U1.165@108.231,74.465 109.771,74.465 111.748,76.442 111.748,78.547 112.002,78.801 112.002,82.255 111.726,82.531 111.726,84.347 113.011,85.632 118.271,85.632 118.767,86.128 118.767,87.548 P4.56@118.735,87.58
PB8: P4.58 U1.167 | length 20.7
  Top Layer w0.254: U1.167@108.231,75.465 109.882,75.465 111.344,76.927 111.344,78.715 111.598,78.969 111.598,80.172 110.744,81.026 110.744,83.937 112.843,86.036 117.843,86.036 117.935,86.128 P4.58@117.935,87.58
PB9: P4.60 U1.168 | length 18.9
  Top Layer w0.254: U1.168@108.231,75.965 109.62,75.965 110.94,77.285 110.94,78.882 111.194,79.136 111.194,79.814 110.236,80.772 110.236,84.074 113.742,87.58 P4.60@117.135,87.58
PB10: P2.2 U1.79 | length 38
  Top Layer w0.254: P2.2@54.61,45.72 54.61,48.822 60.398,54.61 74.041,54.61 77.978,58.547 77.978,60.071 80.872,62.965 U1.79@82.777,62.965
PB11: P2.4 U1.80 | length 37.8
  Top Layer w0.254: P2.4@55.514,45.008 55.514,45.847 55.514,46.116 55.499,46.101 55.495,46.097 55.495,49.071 60.526,54.102 74.168,54.102 78.486,58.42 78.486,59.817 81.134,62.465 U1.80@82.777,62.465
PB12: P2.10 U1.92 | length 35.6
  Top Layer w0.254: P2.10@57.914,45.008 57.914,47.881 62.611,52.578 83.693,52.578 86.254,55.139 U1.92@86.254,56.488
PB13: P2.12 U1.93 | length 35.3
  Top Layer w0.254: P2.12@58.714,45.008 58.714,47.792 63.061,52.139 83.889,52.139 86.754,55.004 U1.93@86.754,56.488
PB14: P2.14 U1.94 | length 34.9
  Top Layer w0.254: P2.14@59.514,45.008 59.514,47.449 63.717,51.652 84.164,51.652 87.254,54.742 U1.94@87.254,56.488
PB15: P2.16 U1.95 | length 34.9
  Top Layer w0.254: P2.16@60.314,45.008 60.314,47.614 63.944,51.244 84.518,51.244 87.754,54.48 U1.95@87.754,56.488
PC4: P4.17 U1.54 | length 58.8
  Top Layer w0.254: U1.54@82.777,75.465 84.89,75.465 87.884,78.459 v1(87.884,78.613)
  Bottom Layer w0.254: v1(87.884,78.613) 87.884,78.599 89.526,80.241 124.691,80.241 133.985,89.535 v1@133.985,91.186
  other v1: 133.92,91.31
PC5: P4.15 U1.55 | length 65.5
  Top Layer w0.254: U1.55@82.777,74.965 85.198,74.965 v1(88.719,78.486)
  Bottom Layer w0.254: v1(88.719,78.486) 89.989,79.756 105.791,79.756 109.855,75.692 125.149,75.692 127.577,78.12 127.577,79.106 127.162,79.521 127.162,81.823 134.747,89.408 v1@134.747,90.805
  other v1: 134.753,90.993
PC6: P2.26 U1.115 | length 44.4
  Top Layer w0.254: P2.26@64.314,45.008 64.314,47.994 65.405,49.086 93.989,49.086 95.392,47.683 95.87,47.683 96.901,48.714 96.901,53.721 97.79,54.61 U1.115@97.79,55.753
PC7: P2.28 U1.116 | length 44.5
  Top Layer w0.254: P2.28@65.114,45.008 65.114,47.27 66.523,48.68 93.824,48.68 95.225,47.279 96.037,47.279 97.409,48.651 97.409,53.467 98.254,54.312 U1.116@98.254,56.488
PC8: P2.30 U1.117 | length 44
  Top Layer w0.254: P2.30@65.914,45.008 65.914,46.927 67.236,48.249 93.683,48.249 95.057,46.875 96.205,46.875 98.044,48.714 98.044,53.531 98.754,54.241 U1.117@98.754,56.488
PC9: P2.32 U1.118 | length 44.4
  Top Layer w0.254: P2.32@66.714,45.008 66.714,47.156 67.403,47.845 91.093,47.845 92.467,46.471 97.242,46.471 98.552,47.781 98.552,53.213 99.254,53.915 U1.118@99.254,56.488
PC10: P4.24 U1.139 | length 41.7
  Top Layer w0.254: U1.139@108.231,61.465 108.24,61.456 110.375,61.456 v1(110.49,61.341) ; v1(131.318,83.566) 131.318,85.217 131.572,85.471 P4.24@131.572,86.741 ; P4.24@131.535,87.58 131.548,87.58 131.56,87.161 P4.24@131.632,87.232
  Bottom Layer w0.254: v1(110.49,61.341) 118.501,61.341 131.318,74.158 v1(131.318,83.566)
PC11: P4.26 U1.140 | length 40.9
  Top Layer w0.254: U1.140@108.231,61.965 111.241,61.965 v1(111.252,61.976) ; v1(130.429,82.931) 130.429,85.598 130.683,85.852 130.683,87.528 P4.26@130.735,87.58
  Bottom Layer w0.254: v1(111.252,61.976) 118.364,61.976 130.44,74.052 130.44,82.92 v1(130.429,82.931)
PC12: P4.28 U1.141 | length 40
  Top Layer w0.254: U1.141@108.231,62.465 109.709,62.465 v1(109.855,62.611) ; v1(129.794,82.169) 129.794,86.338 129.812,86.356 129.812,87.457 P4.28@129.935,87.58
  Bottom Layer w0.254: v1(109.855,62.611) 118.164,62.611 130.036,74.483 130.036,75.631 129.794,75.873 v1(129.794,82.169)
PC13: P4.43 U1.8 | length 27.5
  Top Layer w0.254: U1.8@102.754,81.942 102.754,83.45 105.664,86.36 v1(105.664,88.265)
  Bottom Layer w0.254: v1(105.664,88.265) 106.31,88.911 112.384,88.911 113.185,88.11 120.114,88.11 v1(123.571,91.567)
PC14: C4.2 U1.9 Y1.2 | length 7.8
  Top Layer w0.254: U1.9@102.254,81.942 102.254,84.832 103.759,86.337 Y1.2@103.759,86.487
  Top Layer w0.5: Y1.2@103.759,86.487 103.822,86.55 103.822,88.963 C4.2@103.886,89.027
PC15: C5.2 U1.10 Y1.1 | length 7.6
  Top Layer w0.254: Y1.1@100.459,86.487 100.459,86.337 101.754,85.042 U1.10@101.754,81.942
  Top Layer w0.5: C5.2@100.457,89.027 C5.2@100.457,89.027 100.458,86.488 Y1.1@100.459,86.487
PD2: P4.30 U1.144 | length 39.9
  Top Layer w0.254: U1.144@108.231,63.965 109.771,63.965 v1(110.363,63.373) ; v1(128.905,81.661) 129.147,81.903 129.147,87.568 P4.30@129.135,87.58
  Bottom Layer w0.254: v1(110.363,63.373) 110.71,63.026 118.008,63.026 129.632,74.651 129.632,75.463 128.905,76.19 v1(128.905,81.661)
PD3: P4.32 U1.145 | length 39.4
  Top Layer w0.254: U1.145@108.231,64.465 110.414,64.465 111.252,63.627 v1(111.252,63.603) ; v1(128.143,81.026) 128.143,87.264 128.397,87.518 P4.32@128.335,87.58
  Bottom Layer w0.254: v1(111.252,63.603) 111.263,63.592 118.002,63.592 129.228,74.818 129.228,75.296 128.385,76.139 128.385,80.784 v1(128.143,81.026)
PD4: P4.34 U1.146 | length 37.7
  Top Layer w0.254: U1.146@108.231,64.965 110.558,64.965 v1(111.252,65.659) ; P4.34@127.535,87.58 127.739,87.376 127.739,81.438 127.566,81.265 127.566,80.787 128.651,79.702 v1(128.651,75.057)
  Bottom Layer w0.254: v1(111.252,65.659) 116.332,65.659 122.301,71.628 123.952,71.628 127.381,75.057 v1(128.651,75.057)
PD5: P4.36 U1.147 | length 36.3
  Top Layer w0.254: U1.147@108.231,65.465 109.661,65.465 110.273,66.077 v1(110.296,66.077) ; P4.36@126.735,87.58 127.008,87.307 127.008,80.774 127.889,79.893 v1(127.889,75.692)
  Bottom Layer w0.254: v1(110.296,66.077) 110.389,66.077 110.606,66.294 116.205,66.294 122.174,72.263 123.571,72.263 127,75.692 v1(127.889,75.692)
PD6: P4.38 U1.150 | length 33.5
  Top Layer w0.254: U1.150@108.231,66.965 109.692,66.965 v1(109.855,66.802) ; v1(123.698,73.279) 123.698,73.606 124.714,74.622 124.714,82.55 125.857,83.693 125.857,87.502 P4.38@125.935,87.58
  Bottom Layer w0.254: v1(109.855,66.802) 109.921,66.736 110.375,66.736 110.389,66.722 115.998,66.722 122.047,72.771 123.19,72.771 v1(123.698,73.279)
PD7: P4.40 U1.151 | length 32.3
  Top Layer w0.254: U1.151@108.231,67.465 110.462,67.465 v1(110.617,67.31) ; v1(123.317,74.041) 124.206,74.93 124.206,83.312 125.222,84.328 125.222,87.493 P4.40@125.135,87.58
  Bottom Layer w0.254: v1(110.617,67.31) 116.005,67.31 121.974,73.279 122.355,73.279 123.117,74.041 v1(123.317,74.041)
PD11: P2.18 U1.99 | length 36
  Top Layer w0.254: P2.18@61.114,45.008 61.114,47.779 64.135,50.8 85.725,50.8 89.754,54.829 U1.99@89.754,56.488
PD12: P2.20 U1.100 | length 35.9
  Top Layer w0.254: P2.20@61.914,45.008 61.914,47.944 64.348,50.378 85.938,50.378 90.254,54.694 U1.100@90.254,56.488
PD13: P2.22 U1.101 | length 35.8
  Top Layer w0.254: P2.22@62.714,45.008 62.714,48.109 64.553,49.948 86.27,49.948 90.754,54.432 U1.101@90.754,56.488
PE2: P4.31 U1.1 | length 26.3
  Top Layer w0.254: U1.1@106.254,81.942 106.254,82.694 v1(109.158,85.598)
  Bottom Layer w0.254: v1(109.158,85.598) 122.682,85.598 v1@128.27,91.186
  other v1: 128.322,91.195
PE3: P4.33 U1.2 | length 26.8
  Top Layer w0.254: U1.2@105.754,81.942 105.763,81.951 105.763,83.03 109.035,86.302 109.924,86.302 v1(109.953,86.331)
  Bottom Layer w0.254: v1(109.953,86.331) 111.662,86.331 111.903,86.09 121.958,86.09 127.508,91.64 v1(127.508,91.821)
PE4: P4.35 U1.3 | length 26.9
  Top Layer w0.254: U1.3@105.254,81.942 105.254,83.22 108.942,86.908 110.149,86.908 v1(110.363,87.122)
  Bottom Layer w0.254: v1(110.363,87.122) 110.432,87.191 111.618,87.191 112.315,86.494 121.546,86.494 v1(126.746,91.694)
PE5: P4.37 U1.4 | length 27
  Top Layer w0.254: U1.4@104.754,81.942 104.754,83.418 108.802,87.466 109.31,87.466 v1(109.347,87.503)
  Bottom Layer w0.254: v1(109.347,87.503) 109.928,87.503 110.124,87.699 111.681,87.699 112.482,86.898 120.861,86.898 125.984,92.021 v1@125.984,92.075
  other v1: 125.937,92.079
PE6: P4.39 U1.5 | length 27
  Top Layer w0.254: U1.5@104.254,81.942 104.254,83.553 107.757,87.056 107.757,87.31 v1(107.823,87.376)
  Bottom Layer w0.254: v1(107.823,87.376) 108.404,87.376 109.131,88.103 111.849,88.103 112.649,87.302 120.694,87.302 125.095,91.704 v1(125.095,92.075)
PF6: P4.45 U1.24 | length 35.9
  Top Layer w0.254: U1.24@94.754,81.942 94.754,83.705 96.186,85.137 96.186,86.207 96.52,86.541 v1(96.52,88.519)
  Bottom Layer w0.254: v1(96.52,88.519) 97.79,89.789 112.903,89.789 114.173,88.519 115.062,88.519 116.205,89.662 120.269,89.662 122.29,91.683 122.69,91.683 v1(122.718,91.71)
PF7: P4.47 U1.25 | length 35.5
  Top Layer w0.254: U1.25@94.254,81.942 94.254,84.094 95.782,85.622 95.782,88.597 96.266,89.081 v1(96.266,89.535)
  Bottom Layer w0.254: v1(96.266,89.535) 97.214,90.483 115.478,90.483 115.877,90.085 119.803,90.085 v1(121.92,92.202)
PF8: P4.49 U1.26 | length 36
  Top Layer w0.254: U1.26@93.754,81.942 93.754,84.211 95.378,85.835 95.378,88.764 95.631,89.017 v1(95.631,90.17)
  Bottom Layer w0.254: v1(95.631,90.17) 96.393,90.932 115.628,90.932 116.066,90.494 119.516,90.494 121.083,92.061 121.083,92.381 v1@121.158,92.456
  other v1: 121.149,92.436
PF9: P4.51 U1.27 | length 36.4
  Top Layer w0.254: U1.27@93.254,81.942 93.254,84.364 94.974,86.084 94.974,90.529 v1(95.377,90.932)
  Bottom Layer w0.254: v1(95.377,90.932) 95.885,91.44 115.692,91.44 116.227,90.904 119.352,90.904 120.312,91.864 v1@120.312,92.584
  other v1: 120.312,92.443
PG3: P2.24 U1.107 | length 37.7
  Top Layer w0.254: P2.24@63.514,45.008 63.5,45.022 63.5,48.323 64.711,49.534 88.142,49.534 93.754,55.146 U1.107@93.754,56.488
PG9: P4.42 U1.152 | length 31
  Top Layer w0.254: U1.152@108.231,67.965 111.526,67.965 v1(111.633,68.072) ; v1(122.555,74.295) 123.698,75.438 123.698,83.566 124.335,84.203 P4.42@124.335,87.58
  Bottom Layer w0.254: v1(111.633,68.072) 116.195,68.072 122.418,74.295 v1(122.555,74.295)
PG11: P4.44 U1.154 | length 29.8
  Top Layer w0.254: U1.154@108.231,68.965 110.24,68.965 v1(110.871,69.596) ; v1(121.666,74.549) 122.936,75.819 122.936,83.947 123.535,84.546 P4.44@123.535,87.58
  Bottom Layer w0.254: v1(110.871,69.596) 117.148,69.596 121.6,74.048 121.6,74.483 v1(121.666,74.549)
PG13: P4.46 U1.156 | length 28.6
  Top Layer w0.254: U1.156@108.231,69.965 109.843,69.965 v1(110.744,70.866) ; v1(120.777,74.041) 120.777,74.803 122.428,76.454 122.428,84.328 122.735,84.635 P4.46@122.735,87.58
  Bottom Layer w0.254: v1(110.744,70.866) 117.602,70.866 v1(120.777,74.041)
PH5: P4.29 U1.46 | length 57.2
  Top Layer w0.254: v1(81.788,82.55) 81.788,81.534 81.407,81.153 81.407,79.629 81.562,79.474 82.768,79.474 U1.46@82.777,79.465
  Bottom Layer w0.254: v1(81.788,82.55) 82.369,82.55 82.819,82.1 83.558,82.1 84.308,82.85 121.839,82.85 129.159,90.17 v1(129.159,91.948)
PH6: P2.6 U1.83 | length 35.5
  Top Layer w0.254: P2.6@56.261,45.847 56.261,49.149 60.776,53.664 74.492,53.664 78.994,58.166 78.994,59.436 80.523,60.965 U1.83@82.777,60.965
PH7: P2.8 U1.84 | length 34.6
  Top Layer w0.254: P2.8@57.15,45.593 57.15,49.403 60.96,53.213 74.676,53.213 79.421,57.958 79.421,58.974 80.912,60.465 U1.84@82.777,60.465
PI0: P2.44 U1.131 | length 48.1
  Top Layer w0.254: U1.131@105.754,56.488 105.754,55.576 105.791,55.539 105.791,55.245 108.235,52.801 108.235,46.767 v1(107.188,45.72)
  Bottom Layer w0.254: v1(71.501,45.212) 106.68,45.212 v1(107.188,45.72)
PI1: P2.46 U1.132 | length 48.2
  Top Layer w0.254: U1.132@106.254,56.488 108.647,54.095 108.647,46.29 v1(108.013,45.657)
  Bottom Layer w0.254: v1@72.39,44.577 106.934,44.577 v1(108.013,45.657)
  other v1: 72.311,44.584
PI3: P4.18 U1.134 | length 44.9
  Top Layer w0.254: U1.134@108.231,58.965 109.765,58.965 v1@110.109,59.309 ; v1(133.731,85.598) 133.935,85.802 P4.18@133.935,87.58
  Bottom Layer w0.254: v1(110.179,59.305) 110.244,59.24 118.114,59.24 133.731,74.857 v1(133.731,85.598)
PI8: P4.41 U1.7 | length 27.4
  Top Layer w0.254: U1.7@103.254,81.942 103.263,81.951 103.263,83.324 106.553,86.614 v1(106.553,87.63)
  Bottom Layer w0.254: v1(106.553,87.63) 107.43,88.507 112.016,88.507 112.817,87.706 120.526,87.706 124.333,91.513 v1(124.333,91.821)
RST: C18.2 key1.2 U1.31 | length 82.2
  Top Layer w0.254: U1.31@91.254,81.942 91.254,79.815 v1(96.139,74.93) v1@96.266,74.93 ; v1(103.378,77.47) 107.442,81.534 107.569,81.534 108.966,82.931 108.966,84.455 112.776,88.265 115.57,88.265 116.84,89.535 v1(138.049,89.535)
  Top Layer w0.5: v1(139.7,68.58) 139.7,68.453 140.507,67.646 141.61,67.646 key1.2@141.76,67.496
  Bottom Layer w0.254: v1(96.139,74.93) 100.838,74.93 v1(103.378,77.47) ; v1(138.049,89.535) 139.7,87.884 v1(139.7,68.58)
TFT_BL: CN_1.1
TP_INT: "RGB 1.42"
TP_RST: "RGB 1.41"
TP_SCL: "RGB 1.43"
TP_SDA: "RGB 1.44"
VDDA: C14.2 R7.2 R8.1 U1.39 | length 13.8
  Top Layer w0.254: R8.1@81.788,86.614 81.915,86.614 83.058,85.471 85.217,85.471 87.254,83.434 U1.39@87.254,81.942
  Top Layer w0.5: R8.1@81.788,86.614 81.788,89.027 R7.2@81.534,89.281 84.074,89.281 C14.2@84.201,89.408
VREF+: C15.1 R8.2 U1.38 | length 10.4
  Top Layer w0.254: R8.2@84.074,86.614 84.201,86.614 84.56,86.255 85.068,86.255 87.754,83.569 U1.38@87.754,81.942
  Top Layer w0.5: R8.2@84.201,86.614 84.586,86.999 84.586,87.126 86.741,89.281 C15.1@86.741,89.408
pads on no net: "RGB 1.31" "RGB 1.35" key1.0 LDO1.4 P2.1 P2.3 P2.5 P2.7 P2.9 P2.11 P2.13 P2.15 P2.17 P2.19 P2.21 P2.23 P2.25 P2.27 P2.29 P2.31 P2.33 P2.35 P2.37 P2.39 P2.41 P2.43 P2.45 P2.47 P2.48 P2.49 P2.50 P2.51 P2.52 P2.53 P2.54 P2.55 P2.56 P2.57 P2.58 P2.59 P2.60 P4.1 P4.2 P4.3 P4.4 P4.5 P4.6 P4.7 P4.8 P4.9 P4.10 P4.11 P4.12 P4.14 P4.16 U1.6 U2.4 U3.40 USBC1. USBC1.0 USBC1.A5 USBC1.A8 USBC1.B5 USBC1.B8

## Polygon pours and split planes (outlines as drawn)
GND on Bottom Layer "NONET_L-01_P-001" (solid, remove dead copper, pour order 0): 47.117,95.123 48.006,94.234 153.289,94.234 153.289,40.386 147.574,34.671 145.796,36.449 47.625,36.449
GND on Top Layer "NONET_L-01_P-001" (solid, remove dead copper, pour order 1): 41.529,95.123 155.702,95.123 155.829,95.25 155.829,33.528 48.895,33.528 45.339,37.084

## Other copper
Top Layer:
  rectangle net 3.3V: 87.884,41.021 93.091,41.656

## Silkscreen, mask and mechanical layers (free items; w line width, h text height)
Mechanical 1:
  lines w0.254: 50.213,47.543 cw(c50.672,47.543) 50.672,48.003 ; 50.215,47.55 50.215,39.109 50.334,38.99 144.678,38.99 144.812,39.124 ; 50.672,48.01 52.161,48.01 ccw(c52.161,48.469) 52.621,48.469 ; 50.687,84.633 52.306,84.633 cw(c52.306,84.311) 52.628,84.311 52.628,48.469 ; 50.696,84.635 cw(c50.696,85.117) 50.215,85.117 50.215,93.577 50.309,93.672 144.647,93.672 144.812,93.506
  lines w0.264: 144.812,39.124 144.812,50.26 ccw(c144.78,50.26) 144.78,50.292 137.414,50.292 cw(c137.414,51.562) 136.144,51.562 136.144,63.5 cw(c137.414,63.5) 137.414,64.77 144.78,64.77 ccw(c144.78,64.802) 144.812,64.802 144.812,93.506